# Altium PCB PCB1.PcbDoc
Units mm, origin at the board's own origin, x right, y up, seen from the top; angles counter-clockwise.
Board outline 55.19 x 35 mm, 2 copper layers (Top Layer, Bottom Layer); 13 components, 9 nets, 34 pads, 0 vias.
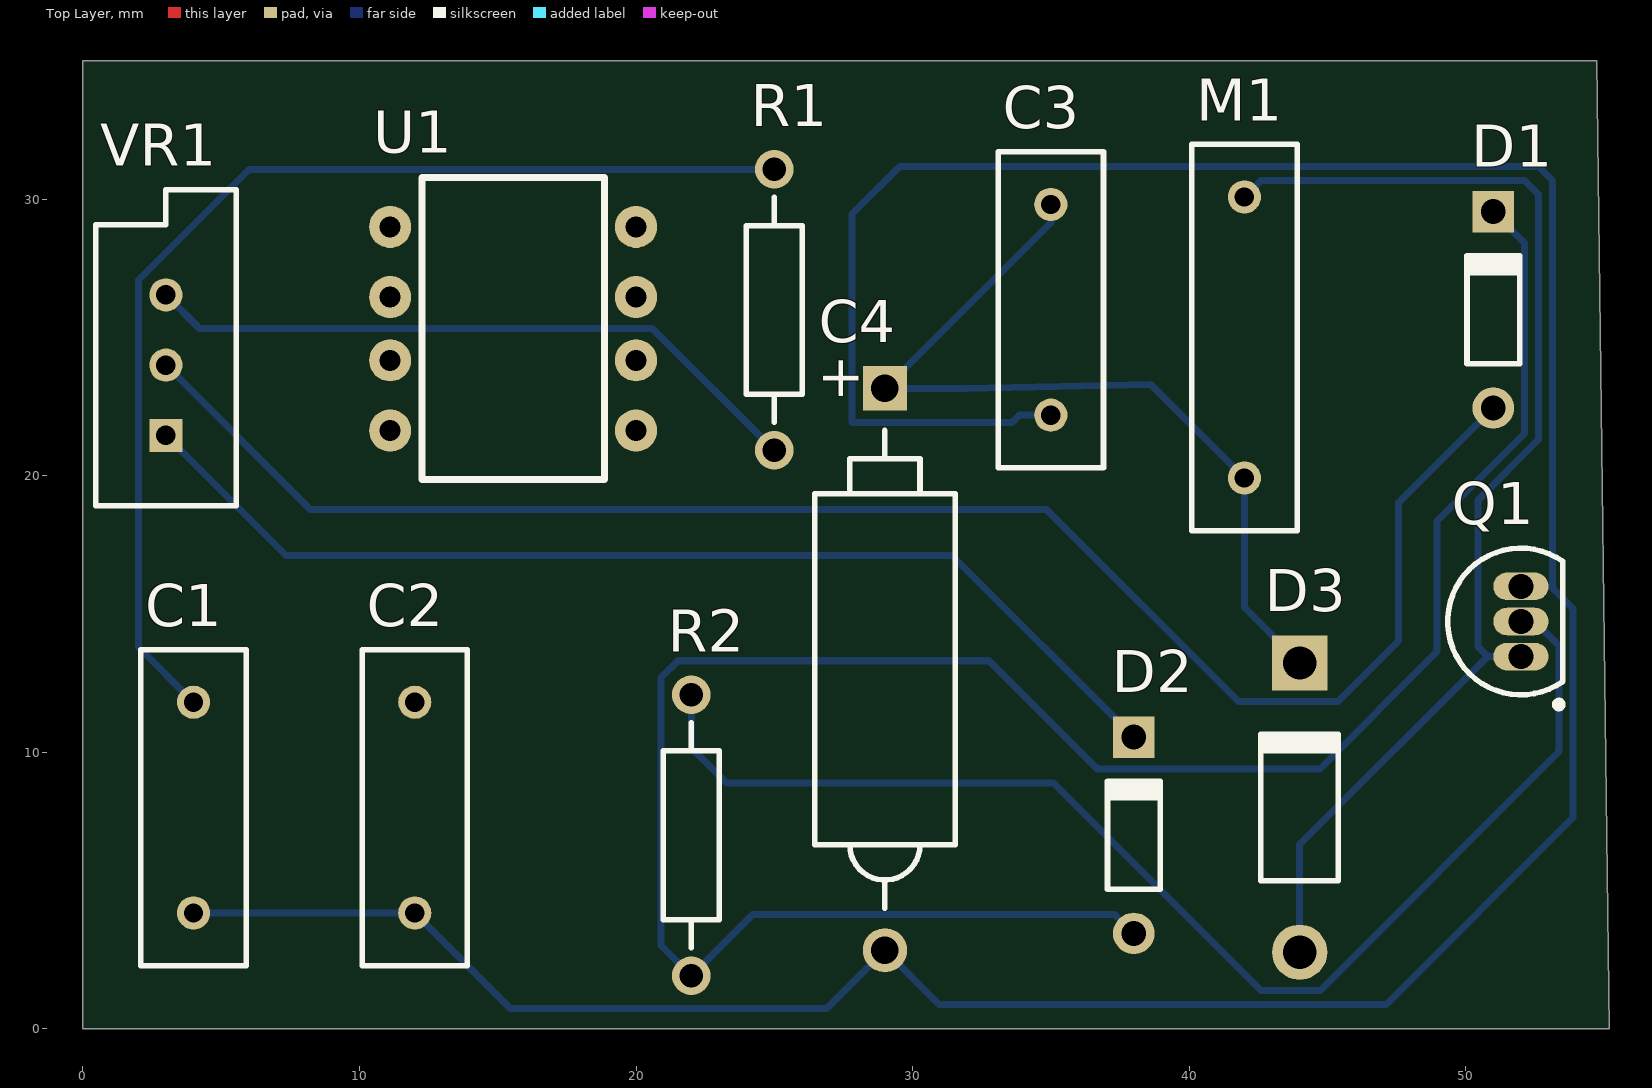
[diagram p0: Top Layer view]
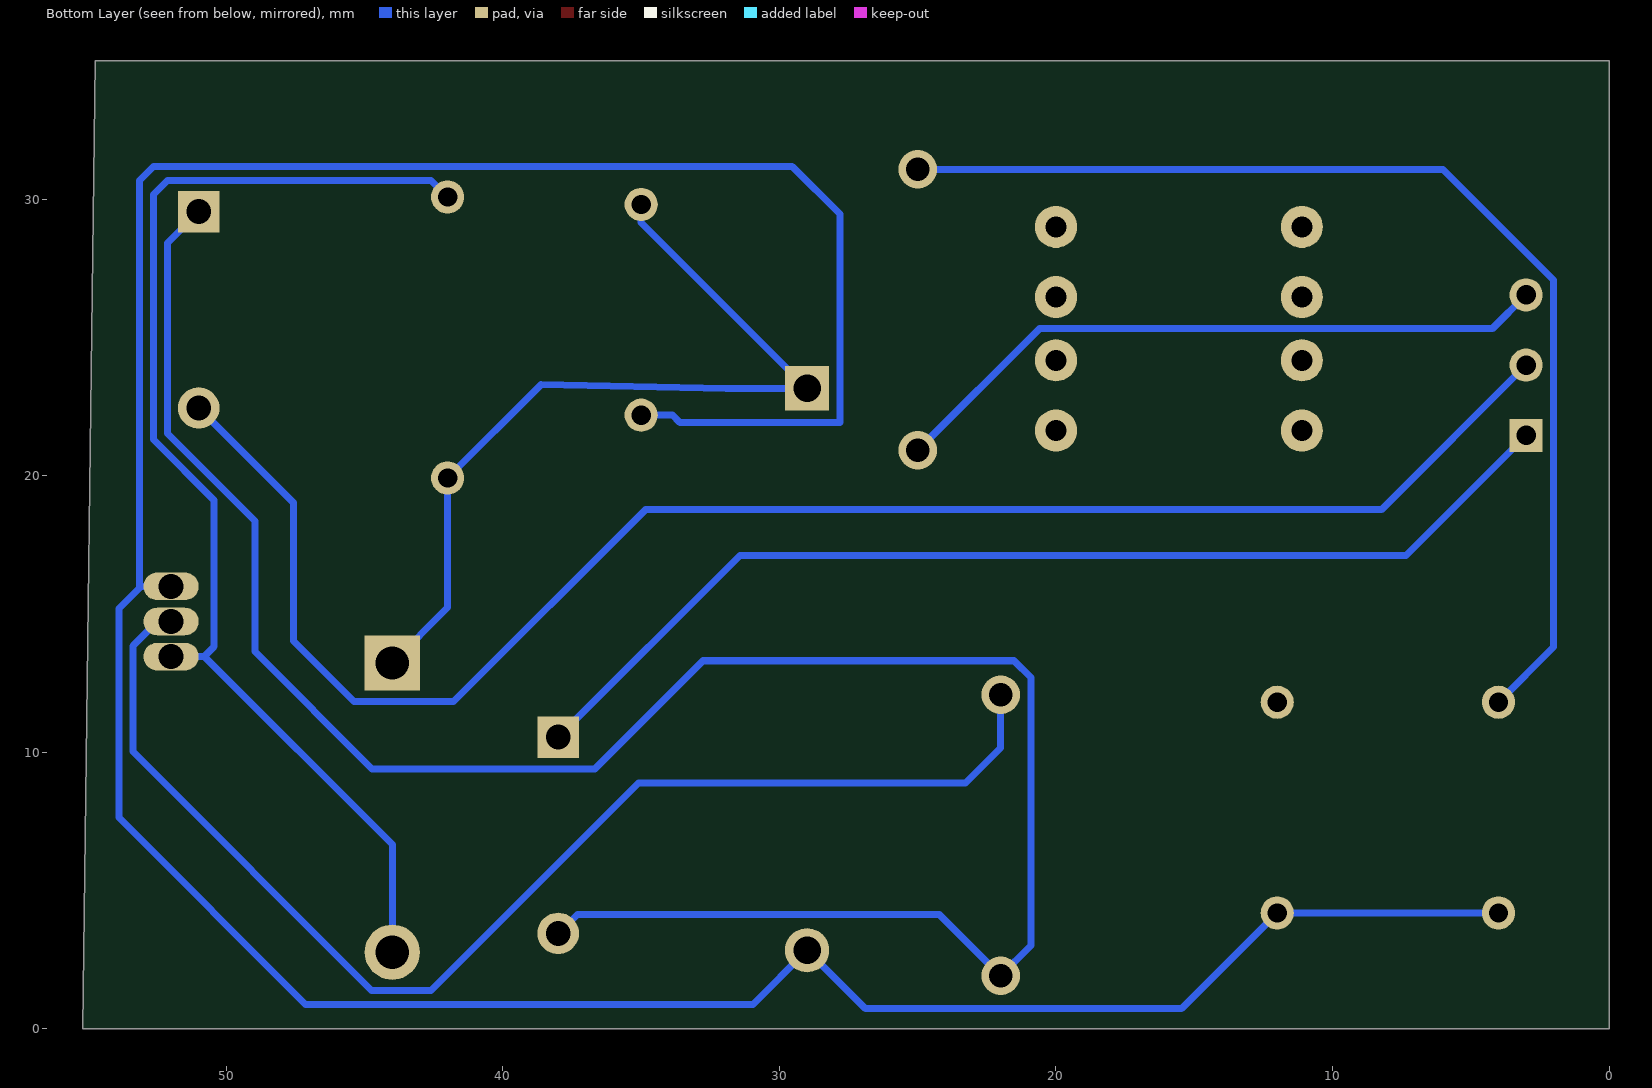
[diagram p1: Bottom Layer view, seen from below]

## Layer stack, top to bottom
Top Solder: solder mask 0.0102, Solder Resist, Dk 3.5
Top Layer: signal copper 0.0356
Dielectric 1: dielectric 0.32, FR-4, Dk 4.8
Bottom Layer: signal copper 0.0356
Bottom Solder: solder mask 0.0102, Solder Resist, Dk 3.5

## Board outline
0,0 55.187,0 54.75,35 0,35

## Design rules (kind name [scope] priority, off if disabled: settings)
Clearance [All] p1: gap=0.254 ignorepadtopadclearanceinfootprint=FALSE except(0: Arc-Hole Track-Hole SMDPad-Hole THPad-Hole Via-Hole Fill-Hole Poly-Hole Region-Hole Text-Hole)
PolygonConnect [All] p1: connectstyle=Relief reliefconductorwidth=0.254 reliefentries=4 polygonreliefangle="90 Angle" airgapwidth=0.254
RoomDefinition Sheet1 [InComponentClass('Sheet1')] p1: confinementstyle=ConfineIn formatcopy=TRUE lockcomponents=FALSE outline -25.4,-25.4 25.4,-25.4 25.4,0 -25.4,0
RoutingLayers [All] p1: top layer_v5=FALSE bottom layer_v5=TRUE
RoutingVias [All] p1: holewidth=0.711 width=1.27 viastyle="Through Hole" minholewidth=0.711 minwidth=1.27 maxholewidth=0.711 maxwidth=1.27
SolderMaskExpansion [All] p1: expansion=0.102 istentingtop=FALSE
Width [All] p1: maxlimit=0.254 minlimit=0.254 preferedwidth=0.254
29 further rules are at their usual default settings.

## Components (designator, comment, footprint, x,y, rotation, side; value= is the part's Value field where it differs from the comment)
C1 "Cap" RAD-0.3 4,8 r90 top value=100nF
C2 "Cap" RAD-0.3 12,8 r90 top value=100nF
C3 "Cap" RAD-0.3 35,26 r90 top value=100nF
C4 "Cap Pol2" POLAR0.8 29,13 r90 top value=100pF
D1 "Diode 1N4148" DO-35 51,26 r90 top
D2 "Diode 1N4148" DO-35 38,7 r90 top
D3 "Diode 1N4001" DO-41 44,8 r90 top
M1 "Motor Servo" RAD-0.4 42,25 r90 top
Q1 "NPN" TO-226-AA 52,14.73 r0 top
R1 "Res2" AXIAL-0.4 25,26 r90 top value=1K
R2 "Res2" AXIAL-0.4 22,7 r90 top value=120
U1 "555" PCBComponent_1 15.555,25.317 r0 top
VR1 "RPot" VR5 3,24 r90 top value=100K

## Footprints (in the part's own frame and the unit in brackets; to place one, negate y for a bottom-side part, rotate by r counter-clockwise, add the part's x,y. Pads: shape width x height; smd on the part's side, far side on the other; paste and mask are expansions set on the pad)
AXIAL-0.4 [mm] "Axial Device, Thru-Hole; 2 Leads; 0.4 in Pin Spacing"
  round 1.4 hole 0.85: 1(-5.08,0) 2(5.08,0)
  silkscreen extent -4.06,-1.02 4.06,1.02
DO-35 [mm] "Diode, Axial; Body 3.8 x 1.9 mm (LxDia. max), Lead Dia. 0.53 mm (max)"
  round 1.5 hole 0.9: 1(-3.55,0)
  rect 1.5x1.5 hole 0.9: 2(3.55,0)
  silkscreen extent -1.95,-0.95 2.05,0.95
DO-41 [mm] "Diode, Axial; Body 5.2 x 2.7 mm (LxDia. max), Lead Dia. 0.86 mm (max)"
  round 2 hole 1.2: 1(-5.23,0)
  rect 2x2 hole 1.2: 2(5.23,0)
  silkscreen extent -2.65,-1.4 2.75,1.4
PCBComponent_1 [mil]
  round 60 hole 30: 1(-175,145) 2(-175,45) 3(-175,-45) 4(-175,-145) 5(175,145) 6(175,45) 7(175,-45) 8(175,-145)
  silkscreen extent -130,-215 130,215
POLAR0.8 [mm] "Polarized Capacitor; 2 Leads"
  rect 1.6x1.6 hole 1: 1(10.16,0)
  round 1.6 hole 1: 2(-10.16,0)
  silkscreen extent -8.64,-2.54 8.64,2.54
RAD-0.3 [mm] "Radial Cap, Thru-Hole; 2 Leads; 0.3 in Pin Spacing"
  round 1.2 hole 0.7: 1(-3.81,0) 2(3.81,0)
  silkscreen extent -5.72,-1.9 5.71,1.91
RAD-0.4 [mm] "Radial Cap, Thru-Hole; 2 Leads; 0.4 in Pin Spacing"
  round 1.2 hole 0.7: 1(-5.08,0) 2(5.08,0)
  silkscreen extent -6.98,-1.91 6.98,1.9
TO-226-AA [mm] "TO, Flat Index; 3 In-Line, Axial Leads; Body Dia. 4.8mm; Leads 0.55 x 0.51 mm (max)"
  oval 2x1 hole 0.9: 1(0,-1.27) 2(0,0) 3(0,1.27)
  silkscreen extent -2.65,-3.13 1.52,2.65, body extent -2.65,-2.66 1.52,2.66, height 5.33
VR5 [mm] "Thru-Hole; 3 Leads"
  rect 1.2x1.2 hole 0.7: 1(-2.54,0)
  round 1.2 hole 0.7: 2(0,0) 3(2.54,0)
  silkscreen extent -5.08,-2.54 6.35,2.54

## Part data
C1 C2 C3: "Capacitor", LatestRevisionDate=17-Jul-2002, LatestRevisionNote="Re-released for DXP Platform.", PackageDescription="Radial Cap, Thru-Hole; 2 Leads; 0.3 in Pin Spacing", PackageReference=RAD-0.3, Published=8-Jun-2000, Publisher="Altium Limited"
C4: "Polarized Capacitor (Axial)", LatestRevisionDate=17-Jul-2002, LatestRevisionNote="Re-released for DXP Platform.", PackageDescription="Polarized Capacitor; 2 Leads", PackageReference=POLAR0.8, Published=8-Jun-2000, Publisher="Altium Limited"
D1 D2: "High Conductance Fast Diode", Code_JEDEC=DO-204-AH, ComponentLink1Description="Manufacturer Link", ComponentLink1URL=http://www.fairchildsemi.com/, ComponentLink2Description=Datasheet, ComponentLink2URL=http://www.fairchildsemi.com/ds/1N%2F1N4148.pdf, DatasheetVersion=1997, LatestRevisionDate=17-Jul-2002, LatestRevisionNote="Re-released for DXP Platform.", PackageDescription="Diode, Axial; Body 3.8 x 1.9 mm (LxDia. max), Lead Dia. 0.53 mm (max)", PackageReference=DO-35, Published=8-Jun-2000, Publisher="Altium Limited"
D3: "1 Amp General Purpose Rectifier", Code_JEDEC=DO-204-AL, ComponentLink1Description="Manufacturer Link", ComponentLink1URL=http://www.fairchildsemi.com/, ComponentLink2Description=Datasheet, ComponentLink2URL=http://www.fairchildsemi.com/ds/1N%2F1N4001.pdf, DatasheetVersion=1998, LatestRevisionDate=17-Jul-2002, LatestRevisionNote="Re-released for DXP Platform.", PackageDescription="Diode, Axial; Body 5.2 x 2.7 mm (LxDia. max), Lead Dia. 0.86 mm (max)", PackageReference=DO-41, PackageVersion=Aug-1999, Published=8-Jun-2000, Publisher="Altium Limited"
M1: "Servo Motor", LatestRevisionDate=17-Jul-2002, LatestRevisionNote="Re-released for DXP Platform.", PackageDescription="Radial Cap, Thru-Hole; 2 Leads; 0.4 in Pin Spacing", PackageReference=RAD-0.4, Published=24-Mar-1999, Publisher="Altium Limited"
Q1: "NPN Bipolar Transistor", Code_JEDEC=TO-226-AA, LatestRevisionDate=17-Jul-2002, LatestRevisionNote="Re-released for DXP Platform.", PackageDescription="TO, Flat Index; 3 In-Line, Axial Leads; Body Dia. 4.8mm; Leads 0.55 x 0.51 mm (max)", PackageReference=TO-226-AA, Published=8-Jun-2000, Publisher="Altium Limited"
R1 R2: "Resistor", LatestRevisionDate=17-Jul-2002, LatestRevisionNote="Re-released for DXP Platform.", PackageDescription="Axial Device, Thru-Hole; 2 Leads; 0.4 in Pin Spacing", PackageReference=AXIAL-0.4, Published=8-Jun-2000, Publisher="Altium Limited"
VR1: "Potentiometer", LatestRevisionDate=17-Jul-2002, LatestRevisionNote="Re-released for DXP Platform.", PackageDescription="Variable Resistor, Thru-Hole; 3 Leads", PackageReference=VR5, Published=8-Jun-2000, Publisher="Altium Limited", Set Position=0.5, Sim Note="Enter the Resistance value and the set point into parameter fields."

## Nets (pads, with @x,y where several pads share a name; then routed paths per layer and width w, separated by ;. In a path a pad name is that pad's centre, name@x,y a point inside that pad or via, vN(x,y) a via of type N, cw(c..) or ccw(c..) an arc to the next point about the centre after c; other vN are vias at no path point)
+12: C3.2 C4.1 D3.2 M1.1 | length 31.1
  Bottom Layer w0.254: C3.2 35,29.16 C4.1 31.928,23.16 38.628,23.292 M1.1 42,15.23 D3.2
GND: C1.1 C2.1 C3.1 C4.2 Q1.3 | length 121.4
  Bottom Layer w0.254: C1.1 C2.1 15.453,0.737 26.897,0.737 C4.2 30.959,0.881 47.134,0.881 53.889,7.636 53.889,15.197 53.086,16 ; C3.1 33.874,22.19 33.604,21.92 27.813,21.92 27.813,29.464 29.538,31.189 52.639,31.189 53.147,30.681 53.147,16 53.086,16 ; Q1.3 53.086,16
NetC1_2: C1.2 R1.2 | length 40.7
  Bottom Layer w0.254: C1.2 2.007,13.803 2.007,27.076 6.01,31.08 R1.2
NetD1_1: D1.1 VR1.2 | length 60.4
  Bottom Layer w0.254: VR1.2 8.229,18.771 34.849,18.771 41.783,11.836 45.39,11.836 47.574,14.021 47.574,19.024 D1.1
NetD1_2: D1.2 D2.1 R2.1 | length 77.8
  Bottom Layer w0.254: D2.1 37.31,4.14 24.22,4.14 R2.1 20.904,3.016 20.904,12.7 21.514,13.31 32.766,13.31 36.678,9.398 44.729,9.398 48.971,13.64 48.971,18.364 52.131,21.524 52.131,28.419 D1.2
NetD2_2: D2.2 VR1.1 | length 39.5
  Bottom Layer w0.254: VR1.1 7.34,17.12 31.43,17.12 D2.2
NetD3_1: D3.1 M1.2 Q1.1 | length 44.8
  Bottom Layer w0.254: M1.2 42.601,30.681 52.131,30.681 52.639,30.173 52.639,21.308 50.444,19.114 50.444,13.818 50.801,13.461 ; D3.1 44,6.66 50.801,13.461 ; 50.801,13.461 50.802,13.46 Q1.1 50.801,13.461
NetQ1_2: Q1.2 R2.2 | length 46.1
  Bottom Layer w0.254: R2.2 22,10.16 23.27,8.89 35.095,8.89 42.596,1.389 44.747,1.389 53.381,10.023 53.381,13.851 52.502,14.73 Q1.2
NetR1_1: R1.1 VR1.3 | length 24.3
  Bottom Layer w0.254: VR1.3 4.223,25.317 20.603,25.317 R1.1
pads on no net: C2.2 U1.1 U1.2 U1.3 U1.4 U1.5 U1.6 U1.7 U1.8

## Text inside footprints (layer, text, board x,y; h text height)
C4: Top Overlay "+" at 28.05,22.652 h1.5 r90